# Altium PCB slave.PcbDoc (part 3 of 8)
Units mm, origin at the board's own origin, x right, y up, seen from the top; angles counter-clockwise.
Board outline 160 x 100 mm, 6 copper layers (Top, FUSED_VBAT-, Signals1, Signals2, SUPPLY, Bottom), stack 1.67 mm thick; 582 components, 375 nets, 1615 pads, 3043 vias.
Unrouted connection lines stored in the file: 1.
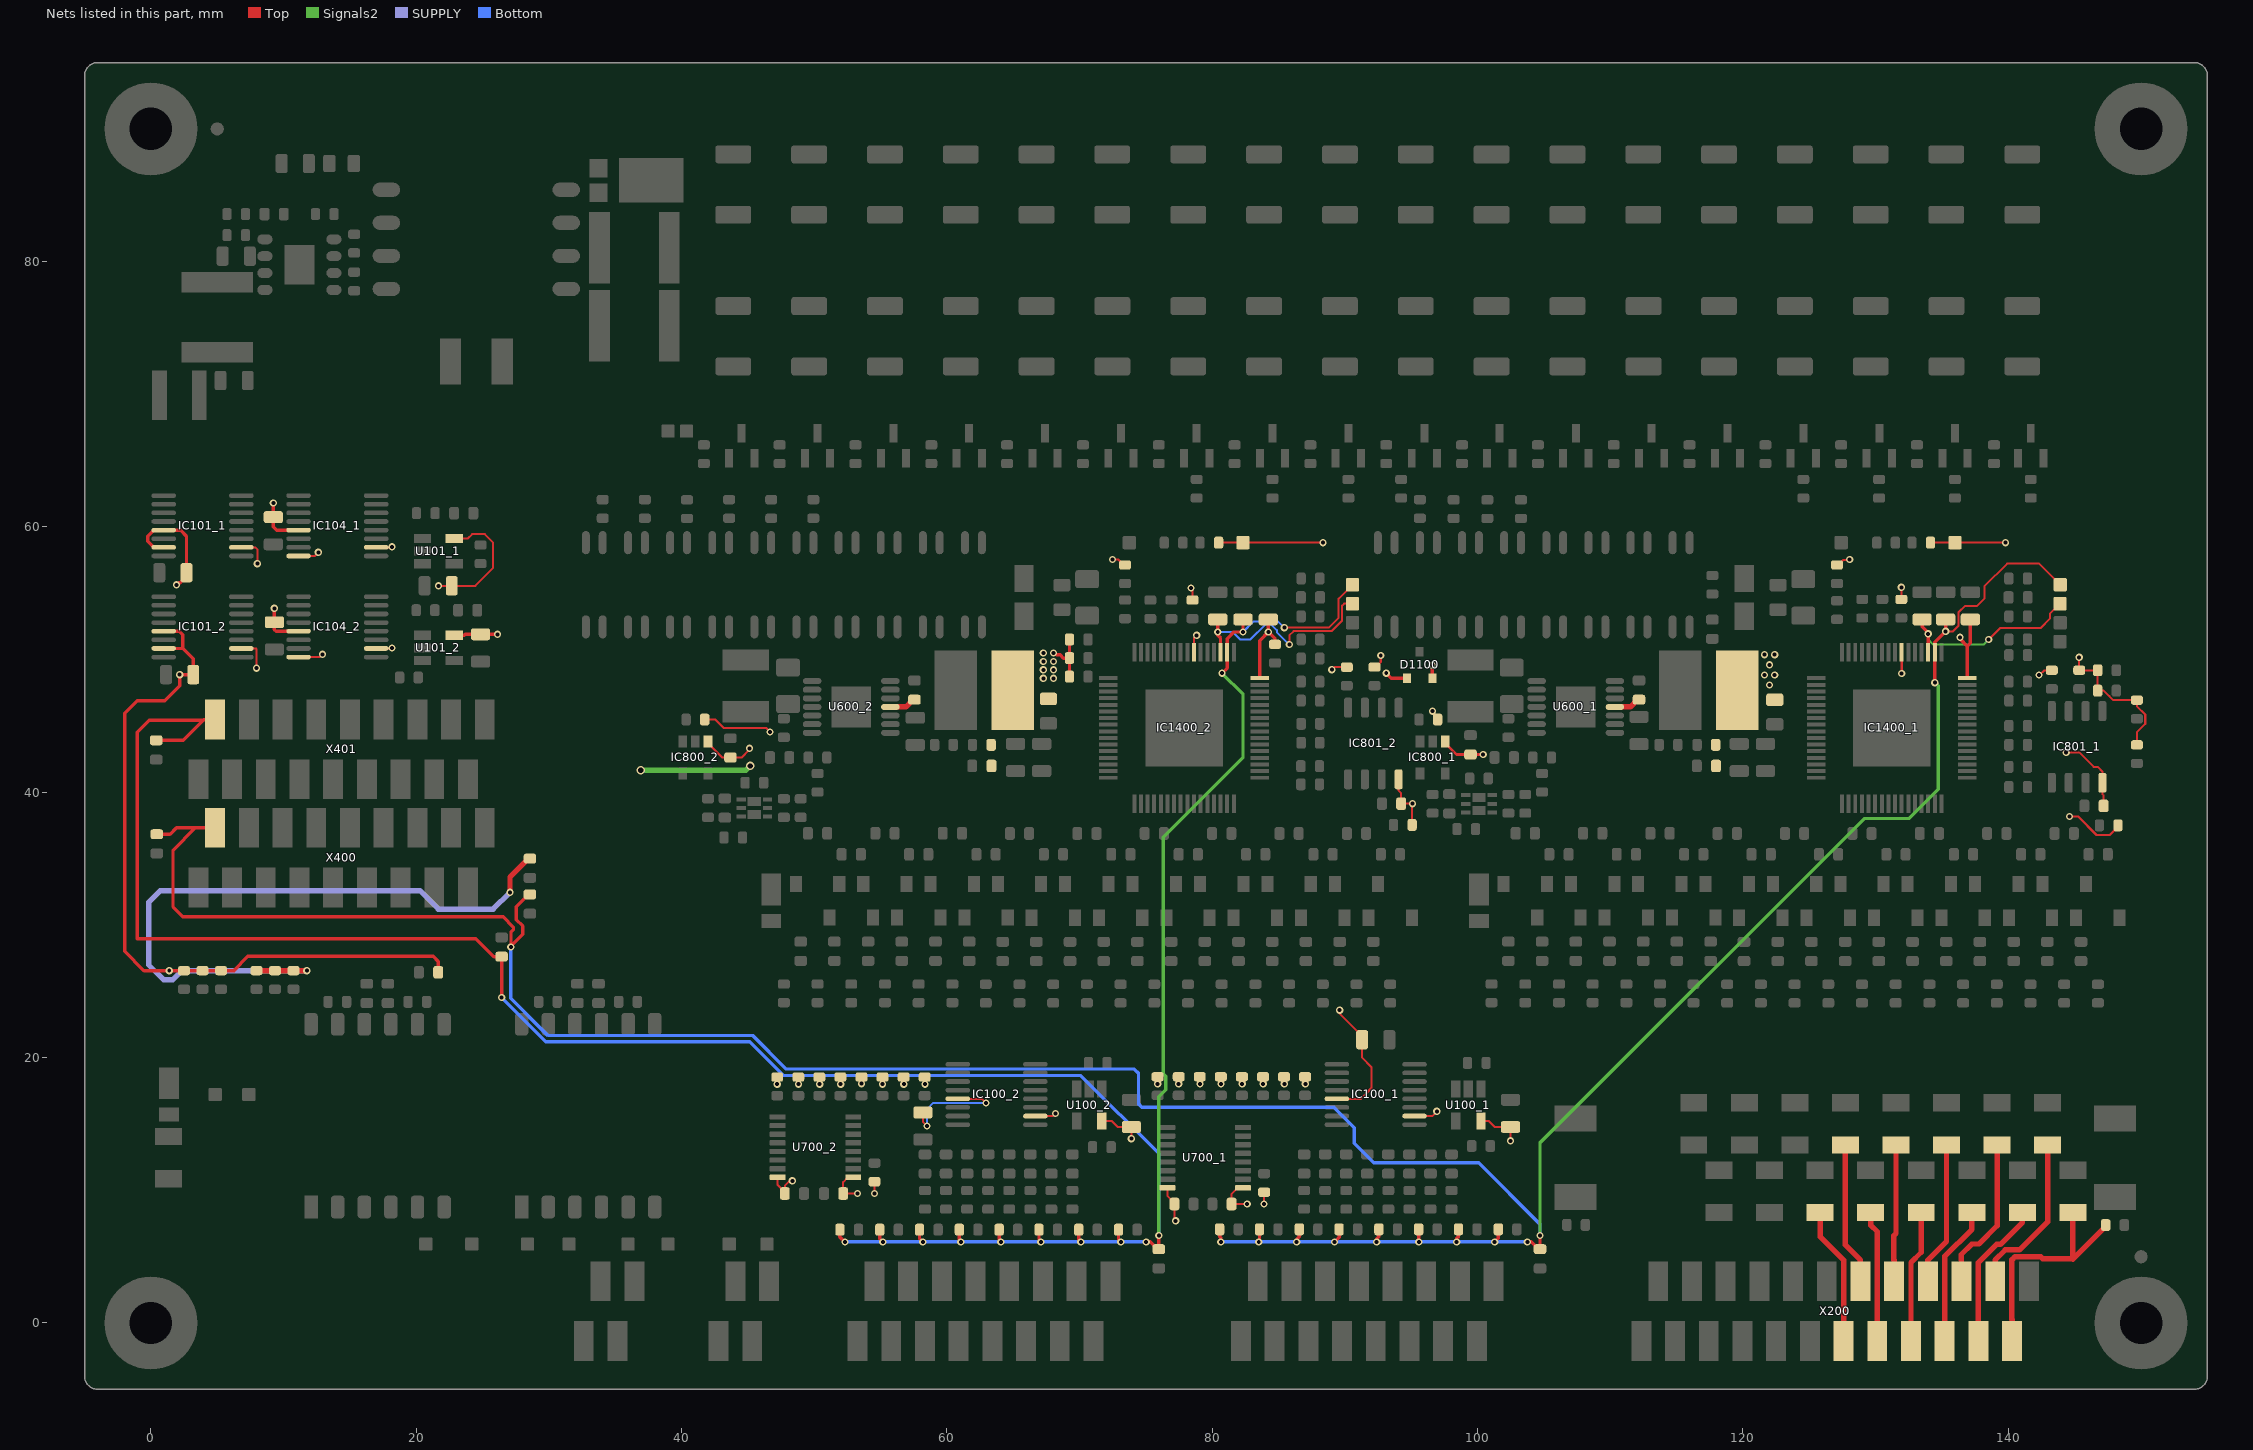
[diagram p6: the nets of this part, all layers, seen from the top]

## Via types
v1: diameter 0.55, hole 0.3, Top to Bottom, tented both sides, 2963 vias
v2: diameter 0.55, hole 0.3, Top to Bottom, 41 vias
v3: diameter 0.75, hole 0.5, Top to Bottom, tented both sides, 22 vias
v4: diameter 0.65, hole 0.4, Top to Bottom, tented both sides, 16 vias
v5: diameter 0.75, hole 0.5, Top to Bottom, 1 vias

## Nets (pads, with @x,y where several pads share a name; then routed paths per layer and width w, separated by ;. In a path a pad name is that pad's centre, name@x,y a point inside that pad or via, vN(x,y) a via of type N, cw(c..) or ccw(c..) an arc to the next point about the centre after c; other vN are vias at no path point) (continued)
+5.0V_VREG_1: C101_1.2 C102_1.2 C103_1.2 C104_1.2 C105_1.2 C404.2 C604_1.2 C700_1.2 C701_1.2 C800_1.2 C801_1.2 C1401_1.2 D1100.2 IC100_1.2 IC100_1.13 IC101_1.2 IC101_1.13 IC101_1.15 IC104_1.2 IC104_1.13 IC104_1.16 IC800_1.1 IC801_1.8 IC1400_1.48 IC1400_1.55 L600_1.2 LD1400_1.2 R602_1.1 R604_1.1 R700_1.2 R701_1.2 R702_1.2 R703_1.2 R704_1.2 R705_1.2 R706_1.2 R707_1.2 R708_1.1 R800_1.2 R801_1.2 R1404_1.2 R1407_1.2 R1419_1.2 R1420_1.2 R1421_1.2 R1422_1.2 R1423_1.2 R1424_1.2 R1425_1.2 R1426_1.2 R1427_1.2 TP1403_1.1 U100_1.5 U101_1.5 U700_1.1 U700_1.16 | length 150
  Top w0.152: IC101_1.2@6.791,58.454 7.867,58.454 8.023,58.298 v1(8.023,57.222) ; IC104_1.16@11.131,57.805 12.35,57.805 v1(12.627,58.082) ; IC104_1.2@16.951,58.454 18.145,58.454 v1(18.183,58.492) ; v1(21.676,55.559) C104_1.2@22.681,55.559 24.457,55.559 25.803,56.905 25.803,58.81 25.168,59.445 24.216,59.445 23.896,59.125 U101_1.5@22.876,59.125 ; v1(75.883,18.024) R707_1.2@75.883,18.553 R707_1.2@75.883,18.603 ; U700_1.16@76.611,10.18 76.611,9.6 77.148,9.062 C700_1.2@77.148,8.962 v1@77.148,7.782 ; v1(77.471,18.024) R706_1.2@77.471,18.553 R706_1.2@77.471,18.603 ; R705_1.2@79.058,18.553 79.058,18.044 v1(79.078,18.024) ; R705_1.2@79.058,18.603 79.078,18.583 R705_1.2@79.078,18.553 ; R704_1.2@80.646,18.553 80.646,18.044 v1(80.666,18.024) ; R704_1.2@80.646,18.603 80.666,18.583 R704_1.2@80.666,18.553 ; R703_1.2@82.233,18.553 82.233,18.044 v1(82.253,18.024) ; R703_1.2@82.233,18.603 82.253,18.583 R703_1.2@82.253,18.553 ; U700_1.1@82.311,10.18 81.911,10.18 81.456,9.725 C701_1.2@81.456,8.962 v1(82.636,8.962) ; R702_1.2@83.821,18.553 83.821,18.044 v1(83.841,18.024) ; R702_1.2@83.821,18.603 83.841,18.583 R702_1.2@83.841,18.553 ; v1(83.906,8.962) R708_1.1@83.906,9.85 ; R701_1.2@85.408,18.553 85.408,18.044 v1(85.428,18.024) ; R701_1.2@85.408,18.603 85.428,18.583 R701_1.2@85.428,18.553 ; R700_1.2@86.996,18.553 86.996,18.044 v1(87.016,18.024) ; R700_1.2@86.996,18.603 87.016,18.583 R700_1.2@87.016,18.553 ; IC100_1.13@89.395,16.892 91.191,16.892 92.002,17.703 92.002,19.281 91.295,19.988 C101_1.2@91.295,21.345 91.295,21.62 89.601,23.313 v1(89.601,23.567) ; IC100_1.2@95.245,15.592 96.568,15.592 v1(96.923,15.947) ; v1(96.606,46.11) 96.606,46.002 96.583,45.98 96.988,45.575 R800_1.2@96.988,45.475 ; U100_1.5@100.255,15.223 100.822,15.223 101.282,14.763 C103_1.2@102.48,14.763 v1(102.48,13.725) ; R1407_1.2@127.086,57.128 127.186,57.128 127.556,57.499 127.998,57.499 v1(128.038,57.54) ; R1404_1.2@131.936,54.53 v1(131.936,55.444) ; LD1400_1.2@134.186,58.81 TP1403_1.1@135.976,58.81 v1(139.786,58.81) ; v1(142.306,48.84) 142.376,48.84 142.727,49.191 R1419_1.2@143.278,49.191 ; v1(144.358,42.998) 145.354,42.998 146.435,41.917 146.734,41.917 147.088,41.562 IC801_1.8@147.088,40.711 147.088,39.859 147.178,39.769 C800_1.2@147.178,38.966 ; v1(144.612,38.172) 145.249,38.172 146.646,36.775 147.634,36.775 148.265,37.405 R801_1.2@148.265,37.505 ; v1(145.342,50.17) R1420_1.2@145.342,49.191 R1424_1.2@146.738,49.191 R1423_1.2@146.738,47.657 147.189,47.657 147.61,47.236 147.909,46.937 R1422_1.2@149.692,46.937 149.692,46.486 150.32,45.858 150.32,45.15 149.692,44.522 R1421_1.2@149.692,43.571
  Top w0.203: IC800_1.1@97.556,43.817 97.556,43.692 98.403,42.845 C801_1.2@99.463,42.845 v1(100.416,42.845) ; v1(131.963,48.942) IC1400_1.55@131.963,50.54
  Top w0.254: IC101_1.15@0.971,58.455 0.221,58.455 -0.232,58.907 -0.232,59.302 0.221,59.755 IC101_1.13@0.971,59.755 2.241,59.755 2.686,59.31 C102_1.2@2.686,56.544 2.686,56.269 2.217,55.8 2.092,55.8 v1(1.927,55.635) ; v1(9.23,61.794) C105_1.2@9.23,60.735 9.23,60.016 9.491,59.755 IC104_1.13@11.131,59.755 ; D1100.2@96.583,48.59 v1(96.583,49.58) ; v1(136.357,51.676) 136.357,51.549 136.913,50.992 ; IC1400_1.48@136.913,48.59 136.913,50.992 ; C1401_1.2@137.136,53.022 137.136,51.214 136.913,50.992
  Top w0.406: R1427_1.2@7.96,26.553 R1426_1.2@9.357,26.553 R1425_1.2@10.754,26.553 v1(11.754,26.553) v1@11.77,26.553 ; v2(27.073,32.457) 27.073,33.599 28.471,34.997 C404.2@28.571,34.997
  SUPPLY w0.406: v1(11.754,26.553) 2.35,26.553 1.669,25.872 0.956,25.872 -0.168,26.996 -0.168,31.695 0.721,32.584 20.279,32.584 21.676,31.187 25.803,31.187 v2(27.073,32.457)
  other v1: 77.238,7.692 122.006,48.078 121.625,48.84 122.387,48.84 122.006,49.602 121.625,50.364 122.387,50.364
+5.0V_VREG_2: C101_2.2 C102_2.2 C103_2.2 C104_2.2 C105_2.2 C407.2 C604_2.2 C700_2.2 C701_2.2 C800_2.2 C801_2.2 C1401_2.2 D1100.1 IC100_2.2 IC100_2.13 IC101_2.2 IC101_2.13 IC101_2.15 IC104_2.2 IC104_2.13 IC104_2.16 IC800_2.1 IC801_2.8 IC1400_2.48 IC1400_2.55 L600_2.2 LD1400_2.2 R602_2.1 R604_2.1 R700_2.2 R701_2.2 R702_2.2 R703_2.2 R704_2.2 R705_2.2 R706_2.2 R707_2.2 R708_2.1 R800_2.2 R801_2.2 R1404_2.2 R1407_2.2 R1419_2.2 R1420_2.2 R1421_2.2 R1422_2.2 R1423_2.2 R1424_2.2 R1425_2.2 R1426_2.2 R1427_2.2 TP1403_2.1 U100_2.5 U101_2.5 U700_2.1 U700_2.16 | length 141.9
  Top w0.152: IC101_2.2@6.791,50.834 7.927,50.834 7.96,50.801 v1(7.96,49.348) ; IC104_2.16@11.131,50.185 12.733,50.185 v1(12.945,50.396) ; IC104_2.2@16.951,50.834 18.145,50.834 v1(18.183,50.872) ; R800_2.2@41.743,45.475 42.56,45.475 43.195,44.84 46.369,44.84 v1(46.668,44.541) ; IC800_2.1@41.993,43.817 41.993,43.692 43.068,42.617 C800_2.2@43.683,42.617 44.536,42.617 45.115,43.196 v1(45.115,43.308) ; v1(47.211,17.998) R707_2.2@47.211,18.527 R707_2.2@47.211,18.577 ; U700_2.16@47.242,10.973 47.242,10.393 C700_2.2@47.78,9.856 ; C700_2.2@47.78,9.756 C700_2.2@47.78,9.856 ; v1(48.346,10.708) 48.155,10.708 47.78,10.332 C700_2.2@47.78,9.856 ; R706_2.2@48.798,18.527 48.798,18.018 v1(48.818,17.998) ; R706_2.2@48.798,18.577 48.818,18.557 R706_2.2@48.818,18.527 ; R705_2.2@50.386,18.527 50.386,18.018 v1(50.406,17.998) ; R705_2.2@50.386,18.577 50.406,18.557 R705_2.2@50.406,18.527 ; R704_2.2@51.973,18.527 51.973,18.018 v1(51.993,17.998) ; R704_2.2@51.973,18.577 51.993,18.557 R704_2.2@51.993,18.527 ; U700_2.1@52.942,10.973 52.542,10.973 52.186,10.617 C701_2.2@52.186,9.756 v1(53.267,9.756) ; v1(53.561,18.036) R703_2.2@53.561,18.527 ; R703_2.2@53.561,18.577 R703_2.2@53.586,18.552 ; v1(54.537,9.756) R708_2.1@54.537,10.643 ; v1(55.148,17.998) R702_2.2@55.148,18.527 R702_2.2@55.148,18.577 ; R701_2.2@56.736,18.527 56.736,18.018 v1(56.756,17.998) ; R701_2.2@56.736,18.577 56.756,18.557 R701_2.2@56.756,18.527 ; C101_2.2@58.188,15.861 58.188,15.153 v1(58.506,14.836) ; R700_2.2@58.323,18.527 58.323,18.018 v1(58.343,17.998) ; R700_2.2@58.323,18.577 58.343,18.557 R700_2.2@58.343,18.527 ; IC100_2.13@60.82,16.892 62.641,16.892 v1(62.951,16.582) ; IC100_2.2@66.67,15.592 67.993,15.592 v1(68.19,15.788) 68.19,15.63 v1@68.152,15.592 ; U100_2.5@71.68,15.223 72.406,15.223 72.866,14.763 C103_2.2@73.905,14.763 v1(73.905,13.883) ; v1(72.476,57.54) 72.917,57.54 73.328,57.128 R1407_2.2@73.428,57.128 ; v1(78.39,55.389) 78.508,55.271 R1404_2.2@78.508,54.48 ; IC1400_2.55@78.623,50.59 78.623,51.622 v1(78.826,51.825) ; LD1400_2.2@80.528,58.81 TP1403_2.1@82.318,58.81 v1(88.351,58.81) ; v1(89.011,49.237) 89.2,49.426 R1419_2.2@90.141,49.426 ; R1420_2.2@92.228,49.429 92.328,49.429 92.699,49.8 v1(92.699,50.301) ; IC801_2.8@94.046,40.972 94.046,40.121 94.241,39.925 C801_2.2@94.241,39.14 v1(95.087,39.14) 95.063,39.116 R801_2.2@95.063,37.537
  Top w0.254: IC101_2.15@0.971,50.835 2.409,50.835 ; IC101_2.13@0.971,52.135 2.125,52.135 2.402,51.858 2.402,50.842 2.409,50.835 ; v1@2.308,48.86 C102_2.2@3.197,48.86 3.197,50.047 2.409,50.835 ; v1@2.308,48.967 2.172,48.831 2.172,48.037 1.038,46.903 -1.025,46.903 -1.978,45.951 -1.978,28.012 -0.519,26.553 v1(1.387,26.553) R1427_2.2@2.499,26.553 R1426_2.2@3.896,26.553 R1425_2.2@5.293,26.553 6.247,26.553 7.316,27.623 21.273,27.623 21.656,27.239 C407.2@21.656,26.425 ; v1(9.311,53.857) C105_2.2@9.311,52.81 9.311,52.258 9.435,52.135 IC104_2.13@11.131,52.135 ; U101_2.5@22.876,51.822 23.627,51.822 23.702,51.897 C104_2.2@24.851,51.897 v1(26.121,51.897) ; 68.285,50.364 68.53,50.364 68.784,50.11 R1422_2.2@69.236,50.11 ; R1421_2.2@69.236,48.713 R1422_2.2@69.236,50.11 ; R1423_2.2@69.236,51.507 R1422_2.2@69.236,50.11 ; IC1400_2.48@83.573,48.59 83.573,51.425 v1(84.223,52.075) ; C1401_2.2@84.223,53.022 v1(84.223,52.075) ; R1424_2.2@84.731,51.144 84.731,51.596 84.703,51.596 v1(84.223,52.075) ; v1(93.113,48.967) 93.491,48.59 D1100.1@94.683,48.59
  Signals2 w0.406: v4(36.916,41.665) 44.853,41.665 v4(45.171,41.982)
  Bottom w0.152: v1(58.506,14.836) 58.506,16.106 58.982,16.582 v1(62.951,16.582)
  other v1: 67.269,48.586 68.031,48.586 2.172,48.86 67.269,49.221 68.031,49.221 67.269,49.856 68.031,49.856 67.269,50.491 68.031,50.491
BST_1: C602_1.2 U600_1.11 | length 2
  Top w0.406: U600_1.11@110.351,46.427 111.518,46.427 112.063,46.972 C602_1.2@112.163,46.972
BST_2: C602_2.2 U600_2.11 | length 2
  Top w0.406: U600_2.11@55.741,46.427 56.908,46.427 57.453,46.972 C602_2.2@57.553,46.972
CELL_0+: F318.1 X200.22 | length 12.5
  Top w0.406: X200.22@139.013,3.143 139.013,4.745 139.769,5.501 140.844,5.501 142.961,7.618 F318.1@142.961,13.405
CELL_0-: F319.1 SJ301.1 X200.23 | length 17.9
  Top w0.406: X200.23@140.283,-1.357 140.283,0.245 140.262,0.266 140.262,4.755 140.5,4.993 142.443,4.993 142.605,4.831 144.785,4.831 144.866,4.912 F319.1@144.866,8.325 ; 144.873,4.807 147.341,7.275 SJ301.1@147.341,7.375
CELL_1+: F317.1 X200.21 | length 11.2
  Top w0.406: X200.21@137.743,-1.357 137.743,4.554 139.111,5.922 139.405,5.922 141.056,7.573 F317.1@141.056,8.325
CELL_2+: F316.1 X200.20 | length 11.7
  Top w0.406: X200.20@136.473,3.143 136.473,4.745 136.452,4.766 136.452,5.152 137.246,5.946 137.775,5.946 139.151,7.322 F316.1@139.151,13.405
CELL_3+: F315.1 X200.19 | length 10.5
  Top w0.406: X200.19@135.203,-1.357 135.203,5.014 137.246,7.057 F315.1@137.246,8.325
CELL_4+: F314.1 X200.18 | length 11.1
  Top w0.406: X200.18@133.933,3.143 133.933,4.745 135.341,6.153 F314.1@135.341,13.405 ; F314.1@135.341,13.405 F314.1@135.341,13.645
CELL_5+: F313.1 X200.17 | length 10
  Top w0.406: X200.17@132.663,-1.357 132.663,4.554 133.436,5.327 F313.1@133.436,8.325
CELL_6+: F312.1 X200.16 | length 10.3
  Top w0.406: X200.16@131.393,3.143 131.393,4.745 131.372,4.766 131.372,6.581 131.531,6.74 F312.1@131.531,13.405
CELL_7+: F311.1 X200.15 | length 9.9
  Top w0.406: F311.1@129.626,8.325 129.626,7.375 130.121,6.88 130.121,0.247 130.123,0.245 X200.15@130.123,-1.357
CELL_8+: F310.1 X200.14 | length 11
  Top w0.406: F310.1@127.721,13.645 F310.1@127.721,13.405 127.721,5.877 128.853,4.745 X200.14@128.853,3.143
CELL_9+: F309.1 X200.13 | length 10.4
  Top w0.406: F309.1@125.816,8.325 125.816,6.506 127.583,4.738 X200.13@127.583,-1.357